# Altium PCB PCB_MegaMod to REbirth Adapter copy_2023-12-04.pcbdoc
Units mil, origin at the board's own origin, x right, y up, seen from the top; angles counter-clockwise.
Board outline 7598.64 x 5788.13 mil, 2 copper layers (Top Layer, Bottom Layer); 101 components, 67 nets, 302 pads, 8 vias.
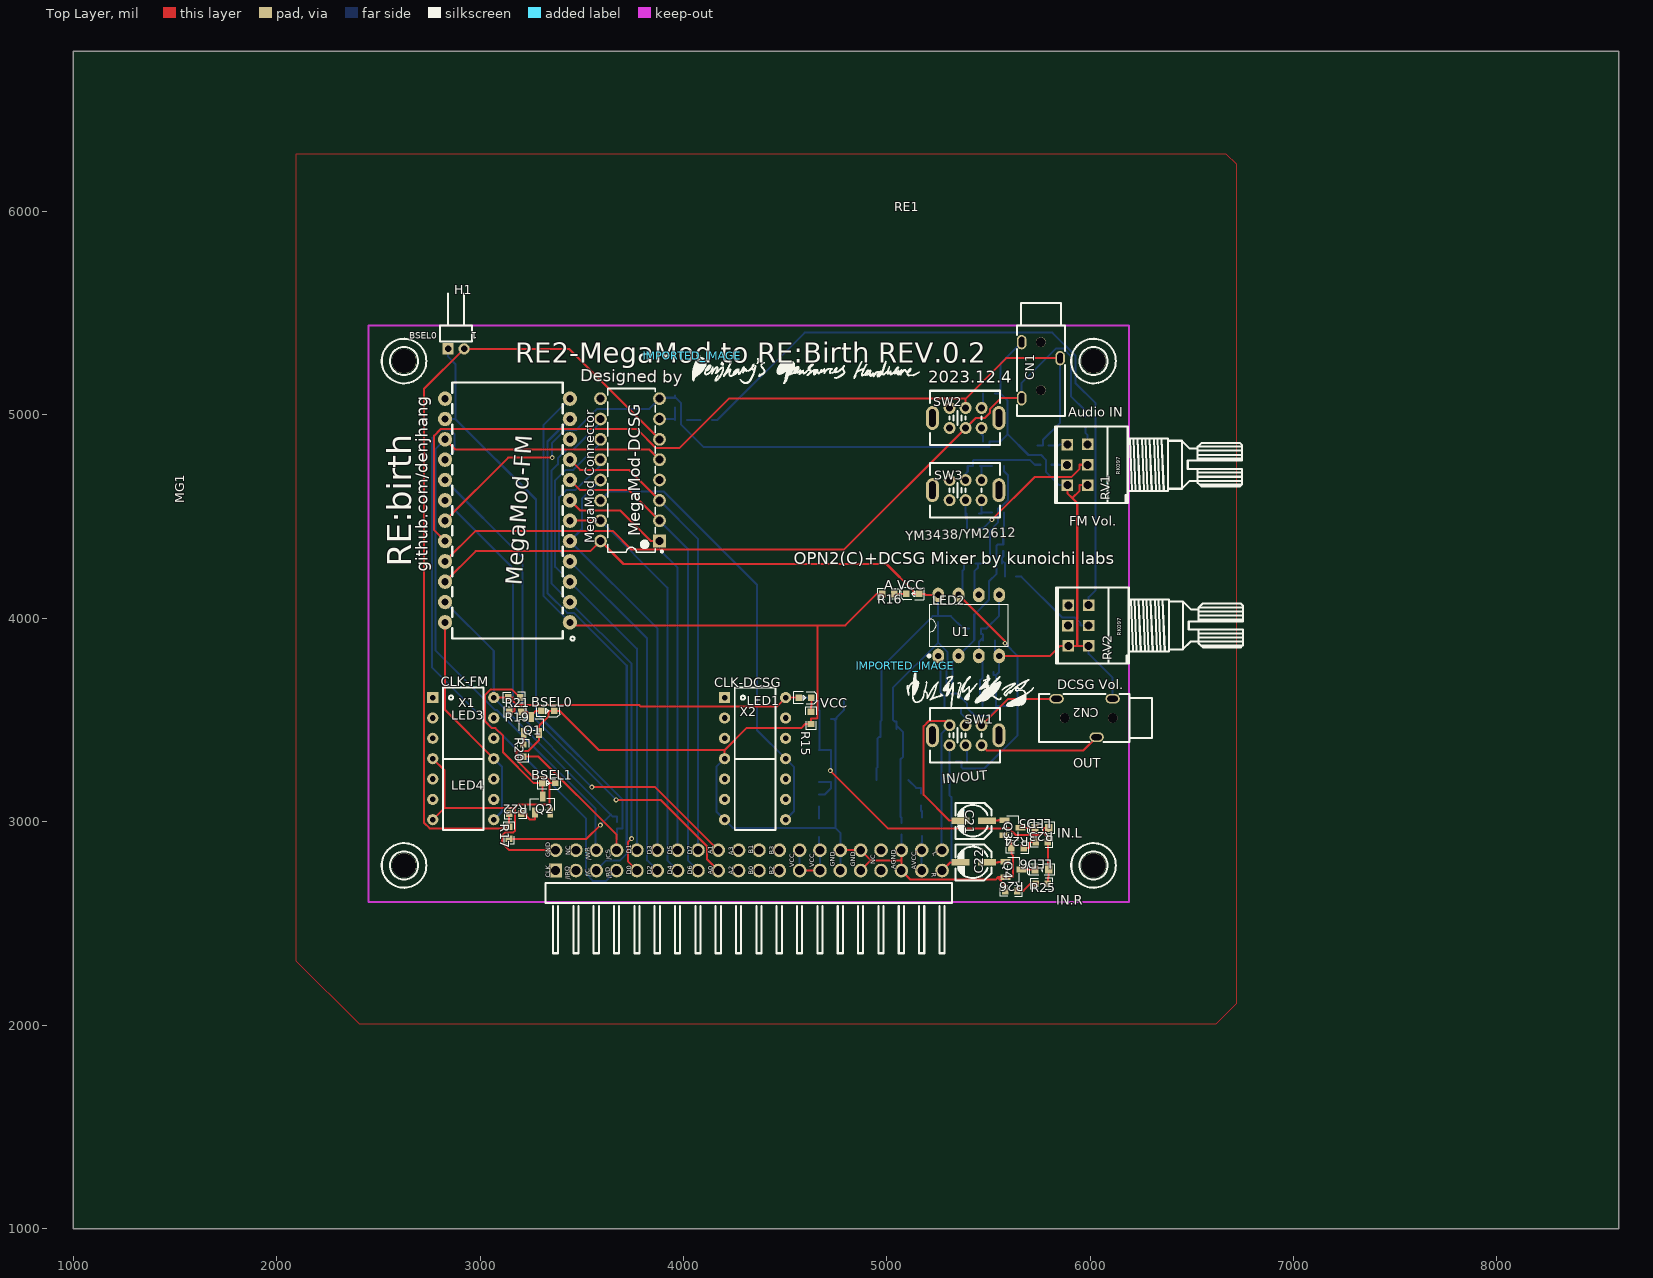
[diagram p0: Top Layer view]
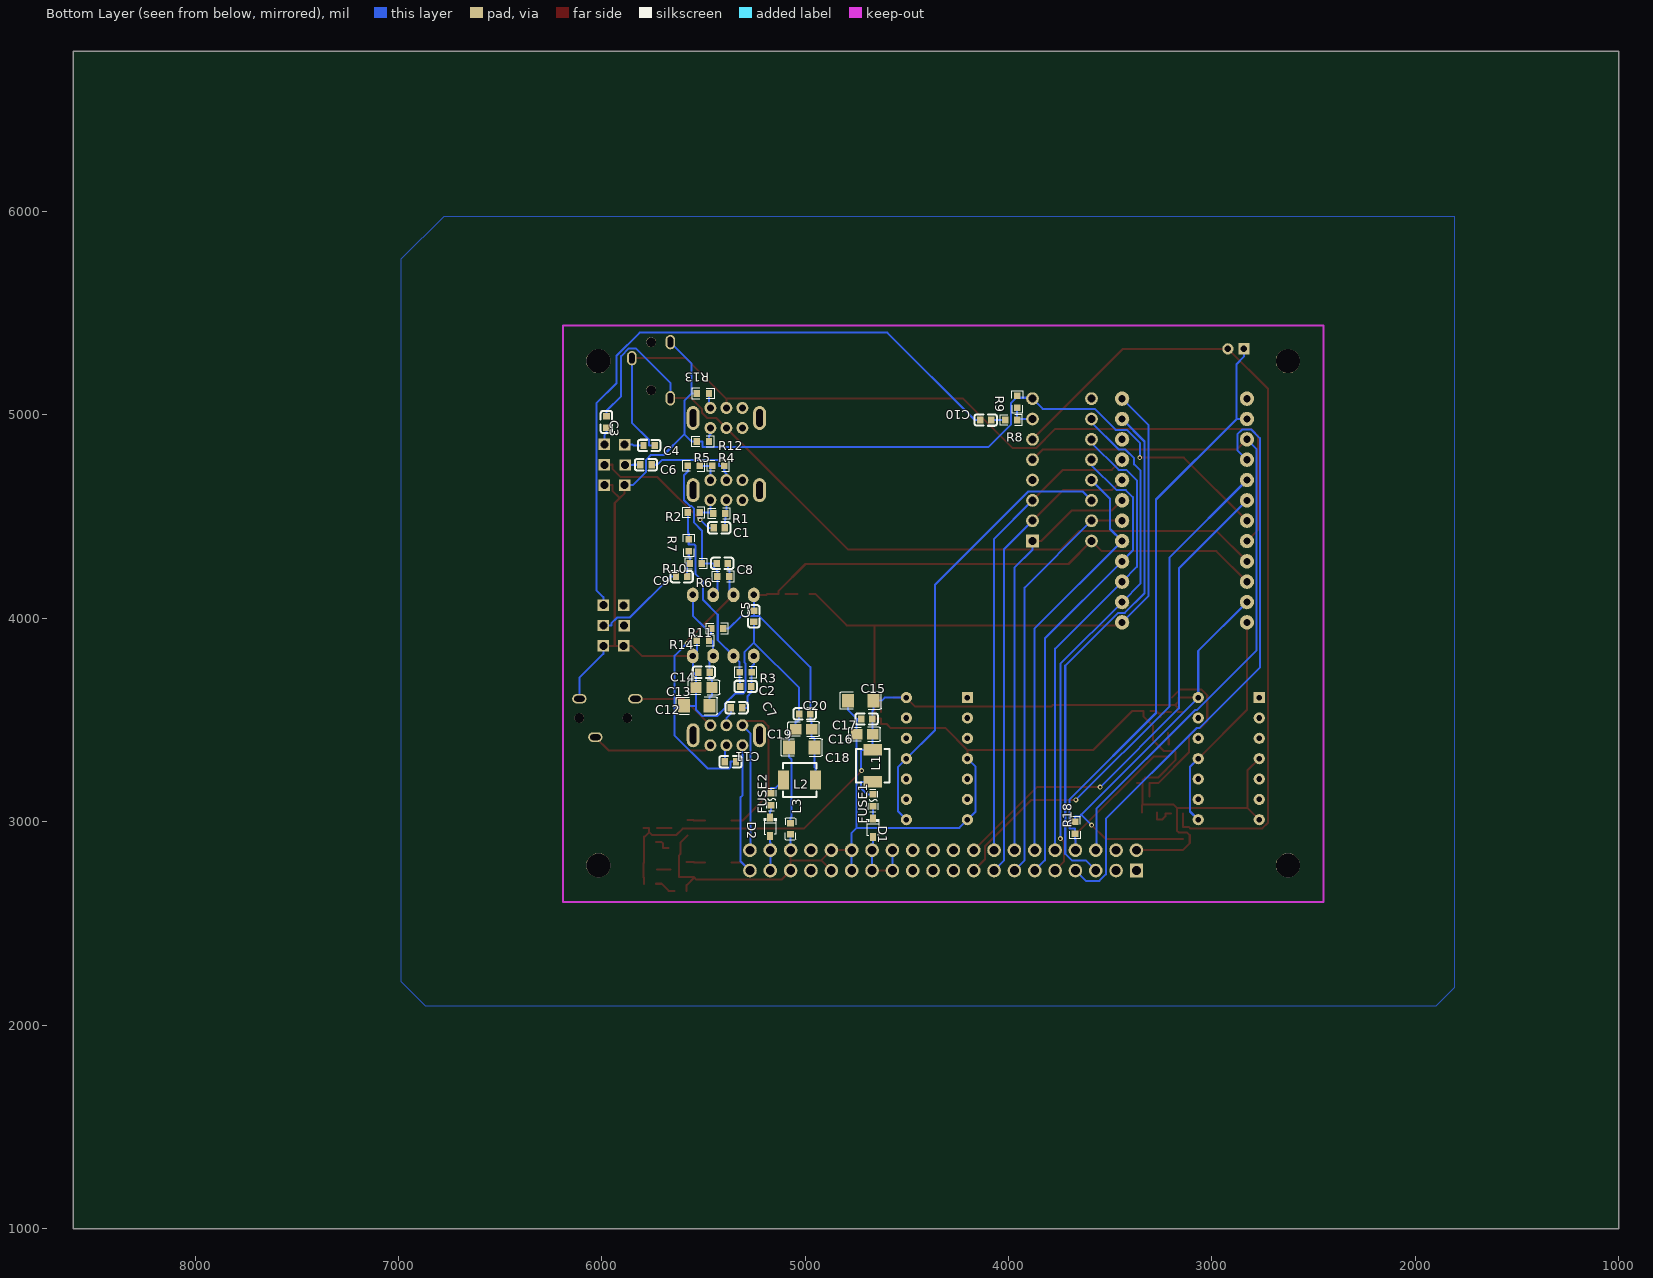
[diagram p1: Bottom Layer view, seen from below]

## Layer stack, top to bottom
Top Layer: signal copper (thickness not stored)
Dielectric: dielectric 12.6, FR-4, Dk 4.8
Bottom Layer: signal copper (thickness not stored)

## Board outline
8598.64,1000 1000,1000 1000,6788.13 8598.64,6788.13

## Components (designator, comment, footprint, x,y, rotation, side; value= is the part's Value field where it differs from the comment)
C1 "4.7u" C0603 5422.5,4445.02 r0 bottom
C2 "120p" C0603 5292.5,3665.03 r0 bottom
C3 "4.7u" C0603 5977.5,4965.02 r90 bottom
C4 "4.7u" C0603 5767.5,4850.02 r180 bottom
C5 "0.1u" C0603 5252.5,4010.03 r270 bottom
C6 "4.7u" C0603 5782.5,4755.02 r0 bottom
C7 "4.7u" C0603 5337.5,3560.03 r180 bottom
C8 "120p" C0603 5407.5,4270.02 r0 bottom
C9 "4.7u" C0603 5607.5,4205.02 r0 bottom
C10 "4.7u" C0603 4112.5,4975.02 r180 bottom
C11 "4.7u" C0603 5367.5,3295.03 r180 bottom
C12 "47u" C1206 5532.5,3570.03 r0 bottom
C13 "47u" C0805 5497.5,3660.03 r0 bottom
C14 "1n" C0603 5497.5,3735.03 r0 bottom
C15 "100u" C1206 4727.5,3595.03 r0 bottom
C16 "47u" C0805 4707.5,3430.03 r0 bottom
C17 "1n" C0603 4697.5,3505.03 r0 bottom
C18 "100u" C1206 5017.5,3365.03 r0 bottom
C19 "47u" C0805 5007.5,3455.03 r0 bottom
C20 "1n" C0603 5002.5,3530.03 r0 bottom
C21 "1u" CAP-D4.0×H5.5 5492.5,3005.03 r0 top
C22 "1u" CAP-D4.0×H5.5 5492.5,2800.03 r0 top
CN1 "PJ-320" AUDIO-TH_HOOYA_PJ-320 5757.5,5220.02 r270 top
CN2 "PJ-320" AUDIO-TH_HOOYA_PJ-320 5972.5,3510.03 r180 top
D1 "1N5819WS" SOD-323_L1.8-W1.3-LS2.5-RD 4667.5,2970.03 r90 bottom
D2 "1N5819WS" SOD-323_L1.8-W1.3-LS2.5-RD 5172.5,2975.03 r90 bottom
FUSE1 "PPTC0.5A/24V 自恢复保险丝-0603" F0603 4667.5,3105.03 r270 bottom
FUSE2 "PPTC0.5A/24V 自恢复保险丝-0603" F0603 5167.5,3110.03 r270 bottom
H1 "PZ200-1-02-W" HDR-TH_2P-P2.00-H-M-W7.2 2882.5,5325.02 r0 top
IMPORTED_IMAGE "IMPORTED_IMAGE" IMPORTED_IMAGE 5091.44,3766.32 r0 top
IMPORTED_IMAGE "IMPORTED_IMAGE" IMPORTED_IMAGE 4042.31,5291.12 r0 top
L1 "22uH" IND-SMD_L4.4-W4.0_PHC0420 4667.5,3275.03 r270 bottom
L2 "22uH" IND-SMD_L4.4-W4.0_PHC0420 5027.5,3205.03 r0 bottom
L3 "100Ω" L0603 5072.5,2965.03 r270 bottom
LED1 "LED0603" LED0603-RD 4597.5,3610.03 r180 top
LED2 "LED0603" LED0603-RD 5127.5,4120.02 r0 top
LED3 "LED0603" LED0603-RD 3332.5,3545.03 r180 top
LED4 "LED0603" LED0603-RD 3337.5,3190.03 r180 top
LED5 "LED-0603_R" LED0603_RED 5762.5,2970.03 r180 top
LED6 "LED-0603_R" LED0603_RED 5762.5,2765.03 r180 top
MG1 "MegaMod-Socket" MEGAMOD-SOCKET 3442.5,4735.02 r90 top
Q1 "MMBT3904" SOT-23-3_L2.9-W1.3-P1.90-LS2.4-BR 3252.5,3475.03 r270 top
Q2 "MMBT3904" SOT-23-3_L2.9-W1.3-P1.90-LS2.4-BR 3307.5,3085.03 r270 top
Q3 "MMBT3904" SOT-23-3_L2.9-W1.3-P1.90-LS2.4-BR 5617.5,2970.03 r180 top
Q4 "MMBT3904" SOT-23-3_L2.9-W1.3-P1.90-LS2.4-BR 5622.5,2765.03 r180 top
R1 "47k" R0603#1 5422.5,4515.02 r0 bottom
R2 "5k6" R0603#1 5547.5,4520.02 r0 bottom
R3 "100k" R0603#1 5292.5,3735.03 r0 bottom
R4 "47k" R0603#1 5427.5,4750.02 r0 bottom
R5 "5k6" R0603#1 5547.5,4750.02 r0 bottom
R6 "100k" R0603#1 5402.5,4205.02 r0 bottom
R7 "80k" R0603#1 5572.5,4360.02 r90 bottom
R8 "2k2" R0603#1 3987.5,4975.02 r0 bottom
R9 "2k2" R0603#1 3957.5,5065.02 r90 bottom
R10 "80k" R0603#1 5537.5,4270.02 r180 bottom
R11 "100k" R0603#1 5432.5,3950.03 r0 bottom
R12 "2k2" R0603#1 5502.5,4870.02 r0 bottom
R13 "2k2" R0603#1 5502.5,5105.02 r180 bottom
R14 "100k" R0603#1 5502.5,3890.03 r0 bottom
R15 "20k" R0603#2 4627.5,3510.03 r270 top
R16 "20k" R0603#2 5007.5,4120.02 r180 top
R17 "62k" R0603#2 3142.5,2945.03 r270 top
R18 "62k" R0603#1 3672.5,2970.03 r270 bottom
R19 "680r" R0603#2 3172.5,3540.03 r0 top
R20 "100r" R0603#2 3212.5,3350.03 r270 top
R21 "680r" R0603#2 3167.5,3610.03 r0 top
R22 "100r" R0603#2 3172.5,3040.03 r180 top
R23 "10k" R0603#2 5762.5,2900.03 r0 top
R24 "10k" R0603#2 5642.5,2870.03 r0 top
R25 "10k" R0603#2 5762.5,2695.03 r0 top
R26 "10k" R0603#2 5612.5,2660.03 r0 top
RE1 "REBIRTH SOUND BOARD" "REBIRTH SOUND BOARD" 2447.5,2605.03 r0 top
RV1 "10kΩ" RK097G-DJ 5987.5,4755.02 r90 top
RV2 "10kΩ" RK097G-DJ 5992.5,3965.03 r90 top
SW1 "SS-22D07" SW-TH_SS-22D07 5387.5,3425.03 r0 top
SW2 "SS-22D07" SW-TH_SS-22D07 5387.5,4985.02 r0 top
SW3 "SS-22D07" SW-TH_SS-22D07 5387.5,4630.02 r0 top
U1 "NE5532-DJ" DIP-8-DJ 5402.5,3965.03 r0 top
X1 "直插有源晶振" DIP14-有源晶振 2912.5,3310.03 r270 top
X2 "直插有源晶振" DIP14-有源晶振 4347.5,3310.03 r270 top
? "" ? 4462.5,5290.03 r0 top
? "" ? 2331.44,3861.92 r0 top
? "" ? 2911.37,2307.33 r0 top
? "" ? 5731.37,2131.01 r0 top
? "" ? 6985.52,3192.53 r0 top
? "" ? 6104.92,5586.88 r0 top
? "" ? 6392.5,5352.46 r0 top
? "" ? 2304.48,5353.61 r0 top
? "" ? 2538.9,5641.19 r0 top
? "" ? 2304.48,2693.61 r0 top
? "" ? 2538.9,2981.19 r0 top
? "" ? 6922.31,4357.24 r0 top
? "" ? 7093.99,5192.54 r0 top
? "" ? 6738.72,4995.14 r0 top
? "" ? 6339.36,2696.44 r0 top
? "" ? 6104.94,2408.86 r0 top
? "" ? 4321.26,5681.8 r0 top
? "" ? 6503,4022.34 r0 top
? "" ? 3517.28,5468.69 r0 top
? "" ? 2188.55,3628.17 r0 top
? "" ? 4237.5,4222.41 r0 top

## Footprints (in the part's own frame and the unit in brackets; to place one, negate y for a bottom-side part, rotate by r counter-clockwise, add the part's x,y. Pads: shape width x height; smd on the part's side, far side on the other; paste and mask are expansions set on the pad)
AUDIO-TH_HOOYA_PJ-320 [mm]
  oval 1.8x1.2 hole 0.7 slot 1.3 at 0 deg paste+0 mask+0.05: 2(-1.5,2.4) 3(-3.5,-2.4) 4(3.5,-2.4)
  round 1.2 hole 1.2 unplated paste+0: ""(-3.5,0) ""(2.5,0)
  silkscreen extent -8.4,-3.01 5.7,3.01
C0603 [mm]
  rect 0.8x0.9 smd paste+0 mask+0.051: 1(0.7,0) 2(-0.7,0)
  silkscreen extent -1.39,-0.72 1.41,0.71
C0805 [mm]
  rect 1.41x1.35 smd paste-100 mask+0.051: 1(1,0) 2(-1,0)
  silkscreen extent -1.96,-0.9 1.96,0.9
C1206 [mm]
  rect 1.485x1.728 smd paste-100 mask+0.051: 1(1.593,0) 2(-1.593,0)
  silkscreen extent -2.56,-1.09 2.56,1.09
CAP-D4.0×H5.5 [mm]
  rect 2.2x0.8 smd paste+0 mask+0.102: 1(0,0) 2(-3.302,0)
  silkscreen extent -3.94,-2.29 0.56,2.21
DIP14-有源晶振 [mil]
  rect 55x55 hole 28 paste+0 mask+2: 1(-300,-145)
  round 55 hole 28 paste+0 mask+2: 2(-200,-145) 3(-100,-145) 4(0,-145) 5(100,-145) 6(200,-145) 7(300,-145) 8(300,155) 9(200,155) 10(100,155) 11(0,155) 12(-100,155) 13(-200,155) 14(-300,155)
  silkscreen extent -350,-95 350,105
DIP-8-DJ [mm]
  oval 1.46x1.825 hole 0.8 paste+0 mask+0.051: 1(-3.81,-3.81) 2(-1.27,-3.81) 3(1.27,-3.81) 4(3.81,-3.81) 5(3.81,3.81) 6(1.27,3.81) 7(-1.27,3.81) 8(-3.81,3.81)
  silkscreen extent -5.1,-3.96 4.87,2.67
F0603 [mil]
  rect 31.75x34.02 smd paste-3937.01 mask+2: 1(29.66,0) 2(-29.65,0)
  silkscreen extent -55,-25 55,25
HDR-TH_2P-P2.00-H-M-W7.2 [mm]
  rect 1.4x1.4 hole 0.8 paste+0 mask+0.051: 1(-1,0)
  round 1.4 hole 0.8 paste+0 mask+0.051: 2(1,0)
  silkscreen extent -2,0.9 2,6.9
IMPORTED_IMAGE [mil]
  silkscreen extent 0,-213 642,0
IND-SMD_L4.4-W4.0_PHC0420 [mm]
  rect 1.4x2.35 smd paste+0 mask+0.051: 1(2,0) 2(-2,0)
  silkscreen extent -2.1,-2.1 2.1,2.1
L0603 [mm]
  rect 0.8x0.864 smd paste-100 mask+0.051: 1(0.7,0) 2(-0.7,0)
  silkscreen extent -1.41,-0.67 1.42,0.65
LED0603-RD [mm]
  rect 0.8x0.8 smd paste+0 mask+0.051: 1(-0.799,-0.003) 2(0.799,0.004)
  silkscreen extent -1.49,-0.75 1.39,0.76
LED0603_RED [mm]
  rect 0.9x1 smd paste+0 mask+0.051: 1(-0.85,0) 2(0.85,0)
  silkscreen extent -1.54,-0.73 1.75,0.73
MEGAMOD-SOCKET [mil]
R0603#1 [mil]
  rect 31.75x34.02 smd paste-3937.01 mask+2: 1(29.65,0) 2(-29.65,0)
  silkscreen extent -55,-26 55,26
R0603#2 [mil]
  rect 31.75x34.02 smd paste-3937.01 mask+2: 1(-29.65,0) 2(29.66,0)
  silkscreen extent -55,-26 55,26
"REBIRTH SOUND BOARD" [mil]
RK097G-DJ [mil]
  rect 56x56 hole 39.4 paste+0 mask+4: 1(-100,0) 2(0,0) 3(100,0) 4(-100,100) 5(-1,102) 6(99,100)
  silkscreen extent -187,-758 187,160
SOD-323_L1.8-W1.3-LS2.5-RD [mm]
  rect 1x0.75 smd paste+0 mask+0.051: 1(1.173,0) 2(-1.173,0)
  silkscreen extent -0.9,-0.8 1.08,0.8
SOT-23-3_L2.9-W1.3-P1.90-LS2.4-BR [mm]
  rect 1.25x0.7 smd paste+0 mask+0.051: 1(1,-0.95) 2(1,0.95) 3(-1,0)
  silkscreen extent -0.73,-1.53 0.73,1.53
SW-TH_SS-22D07 [mm]
  round 1.5 hole 0.9 paste+0 mask+0.051: 1(-2,1.25) 2(0,1.25) 3(2,1.25) 4(-2,-1.25) 5(0,-1.25) 6(2,-1.25)
  oval 1.6x3 hole 0.8 slot 2.2 at 90 deg paste+0 mask+0.051: 7(4.15,0) 8(-4.15,0)
  silkscreen extent -4.43,-3.4 4.27,3.4
? [mil]

## Free pads (board coordinates)
  rect 62.99x66.93 hole 43.31 paste+0 mask+2: 1(3371.41,2760.02)
  round 70.87 hole 35.43 paste+0 mask+2: 1(3442.11,3980.03) 2(3442.11,4080.03) 3(3442.11,4180.02) 4(3442.11,4280.02) 5(3442.11,4380.02) 6(3442.11,4480.02) 7(3442.11,4580.02) 8(3442.11,4680.02) 9(3442.11,4780.02) 10(3442.11,4880.02) 11(3442.11,4980.02) 12(3442.11,5080.02) 13(2827.94,5080.02) 14(2827.94,4980.02) 15(2827.94,4880.02) 16(2827.94,4780.02) 17(2827.94,4680.02) 18(2827.94,4580.02) 19(2827.94,4480.02) 20(2827.94,4380.02) 21(2827.94,4280.02) 22(2827.94,4180.02) 23(2827.94,4080.03) 24(2827.94,3980.03)
  round 66.93 hole 43.31 paste+0 mask+2: 2(3371.41,2860.02) 3(3471.41,2760.02) 4(3471.41,2860.02) 5(3571.41,2760.02) 6(3571.41,2860.02) 7(3671.41,2760.02) 8(3671.41,2860.02) 9(3771.41,2760.02) 10(3771.41,2860.02) 11(3871.41,2760.02) 12(3871.41,2860.02) 13(3971.41,2760.02) 14(3971.41,2860.02) 15(4071.41,2760.02) 16(4071.41,2860.02) 17(4171.41,2760.02) 18(4171.41,2860.02) 19(4271.41,2760.02) 20(4271.41,2860.02) 21(4371.41,2760.02) 22(4371.41,2860.02) 23(4471.41,2760.02) 24(4471.41,2860.02) 25(4571.41,2760.02) 26(4571.41,2860.02) 27(4671.41,2760.02) 28(4671.41,2860.02) 29(4771.41,2760.02) 30(4771.41,2860.02) 31(4871.41,2760.02) 32(4871.41,2860.02) 33(4971.41,2760.02) 34(4971.41,2860.02) 35(5071.41,2760.02) 36(5071.41,2860.02) 37(5171.41,2760.02) 38(5171.41,2860.02) 39(5271.41,2760.02) 40(5271.41,2860.02)
  rect 62.99x62.99 hole 39.37 paste+0 mask+2: 25(3882.26,4380.02)
  round 62.99 hole 39.37 paste+0 mask+2: 26(3882.26,4480.02) 27(3882.26,4580.02) 28(3882.26,4680.02) 29(3882.26,4780.02) 30(3882.26,4880.02) 31(3882.26,4980.02) 32(3882.26,5080.02) 33(3592.5,5080.02) 34(3592.5,4980.02) 35(3592.5,4880.02) 36(3592.5,4780.02) 37(3592.5,4680.02) 38(3592.5,4580.02) 39(3592.5,4480.02) 40(3592.5,4380.02)
  round 119.37 hole 119.37 unplated paste+0: ""(2626.35,2785.03) ""(2626.35,5265.02) ""(6016.35,2785.03) ""(6016.35,5265.02)

## Via types
v1: diameter 24.02, hole 12.01, Top Layer to Bottom Layer, tented both sides, 8 vias

## Nets (pads, with @x,y where several pads share a name; then routed paths per layer and width w, separated by ;. In a path a pad name is that pad's centre, name@x,y a point inside that pad or via, vN(x,y) a via of type N, cw(c..) or ccw(c..) an arc to the next point about the centre after c; other vN are vias at no path point)
47K-1-L: C1.2 R1.2 SW3.5 | length 152.9
  Bottom Layer w10: SW3.5 5387.5,4506.28 R1.2@5392.84,4500.94 ; R1.2 R1.2@5392.84,4500.94 ; C1.2 5394.94,4484.77 5392.84,4486.86 R1.2@5392.84,4500.94
47K-1-R: C6.2 R4.2 SW3.2 | length 469.3
  Bottom Layer w10: SW3.2 5387.5,4711.52 5397.84,4721.86 R4.2 5424.87,4750.02 5424.87,4777.06 5426.06,4778.24 5704.82,4778.24 5728.04,4755.02 C6.2
47K-2-L: R1.1 R2.2 SW3.6 | length 131.1
  Bottom Layer w10: R1.1 5465.67,4515.02 5466.24,4515.6 R1.1@5466.24,4520.02 ; SW3.6 R1.1@5466.24,4520.02 ; R2.2 5490.82,4520.02 R1.1@5466.24,4520.02
47K-2-R: R4.1 R5.2 SW3.3 | length 131.5
  Bottom Layer w10: R4.1 R4.1@5466.24,4750.02 ; SW3.3 R4.1@5466.24,4750.02 ; R5.2 R4.1@5466.24,4750.02
/IC: pad.5@3571.41,2760.02 pad.11@3442.11,4980.02 | length 2548.6
  Bottom Layer w10: pad.11@3442.11,4980.02 3331.6,4869.52 3331.6,4122.9 3427.81,4026.68 3461.46,4026.68 3721.36,3766.78 3721.36,2842.43 3688.95,2810.03 3621.42,2810.03 pad.5@3571.42,2760.03
/RD: pad.7@3671.41,2760.02 pad.16@2827.94,4780.02 | length 2931.8
  Bottom Layer w10: pad.16@2827.93,4780.02 2874.93,4827.02 2874.93,4904.06 2850.59,4928.4 2807.15,4928.4 2764.83,4886.09 2764.83,3757.43 3062.24,3460.03 3076.11,3460.03 3521.42,3014.72 3521.42,2741.64 3554.04,2709.03 3620.42,2709.03 pad.7@3671.42,2760.03
/WR: pad.6@3571.41,2860.02 pad.15@2827.94,4880.02 pad.29@3882.26,4780.02 | length 3467.9
  Top Layer w10: pad.15@2827.93,4880.02 2877.93,4830.02 3832.26,4830.02 pad.29@3882.26,4780.02
  Bottom Layer w10: pad.15@2827.93,4880.02 2781.29,4833.39 2781.29,3841.49 3074.05,3548.74 3083.54,3548.74 3568.17,3064.11 3568.17,2863.28 pad.6@3571.42,2860.03
A0: pad.17 | length 2604.4
  Top Layer w10: v1(3668.81,3107.41) 3887.2,3107.41 4116.09,2878.53 4116.09,2815.36 pad.17@4171.42,2760.03
  Bottom Layer w10: pad.17@2827.93,4680.02 3208.49,4299.47 3208.49,3567.74 v1(3668.81,3107.41)
A1: pad.18 | length 2458.9
  Top Layer w10: v1(3549.71,3170.39) 3861.06,3170.39 pad.18@4171.42,2860.03
  Bottom Layer w10: pad.18@2827.93,4580.02 3162.87,4245.09 3162.87,3557.22 v1(3549.71,3170.39)
A.GND: C5.1 C12.1 C13.1 C14.1 C18.1 C19.1 C20.1 CN1.3 CN2.3 L3.2 pad.19@2827.94,4480.02 pad.32@3882.26,5080.02 R9.1 R12.1 R13.2 R14.1 RV1.1 RV1.4 RV2.1 RV2.4 U1.4 | length 8094.6
  Top Layer w10: pad.19@2827.93,4480.02 3137.91,4790.01 v1(3354.97,4790.01) ; U1.4 5803.35,3815.03 5853.35,3865.03 RV2.4 5936.25,3865.03 ; RV1.4 5887.5,4615.88 5911.88,4591.51 ; RV1.1 5948.35,4655.02 5948.35,4627.98 5911.88,4591.51 ; RV2.1 5936.25,3865.03 ; 5911.88,4591.51 5936.25,4567.12 5936.25,3865.03
  Bottom Layer w10: v1(3354.97,4790.01) 3354.97,4862.38 3419.26,4926.66 3473.85,4926.66 3577.21,5030.02 3832.26,5030.02 3882.26,5080.02 3886.76,5084.52 3957.5,5084.52 R9.1@3957.5,5089.6 ; R9.1 R9.1@3957.5,5089.6 ; C19.1 C19.1@5046.87,3473.89 ; L3.2 5072.51,3019.49 5067.47,3024.53 5067.47,3307.12 5080.2,3319.86 C18.1 5080.2,3440.57 C19.1@5046.87,3473.89 ; C5.1 5252.5,3955.57 5252.5,3880.55 5252.39,3880.45 ; C14.1 5525.06,3720.59 C14.1@5536.87,3720.59 ; R14.1 5532.16,3835.36 U1.4 5552.5,3736.22 C14.1@5536.87,3720.59 ; R13.2 5559.18,5105.02 ; C12.1 5554.82,3570.03 5536.87,3570.03 ; CN1.3 5559.18,5253.98 5559.18,5105.02 ; RV1.4 5848.35,4655.02 5782.02,4721.35 5782.02,4779.48 5758.65,4802.85 5696.7,4802.85 5594.35,4905.19 ; RV2.1 5992.5,3825.88 6110.3,3708.07 CN2.3 ; R9.1@3957.5,5089.6 3987.5,5059.6 3987.5,4953.38 4099.07,4841.81 5503.94,4841.81 5505.13,4842.99 5505.13,4870.02 R12.1 5559.18,4870.02 5594.35,4905.19 ; C19.1@5046.87,3473.89 5046.87,3492.76 5038.46,3492.76 5030.06,3501.16 5030.06,3515.59 C20.1 5030.06,3658.11 5252.39,3880.45 ; 5252.39,3880.45 5297.4,3835.43 5297.4,3782.64 5292.3,3777.53 5292.3,3643.47 5305.21,3630.55 5344.72,3630.55 5394.67,3580.61 5394.67,3558.84 5433.63,3519.89 5506.98,3519.89 5536.87,3549.78 5536.87,3570.03 ; 5536.87,3570.03 5536.87,3622.3 C13.1 C14.1@5536.87,3720.59 ; 5559.18,5105.02 5594.35,5069.85 5594.35,4905.19
A.VCC: C5.2 C18.2 C19.2 C20.2 L2.2 LED2.2 pad.22@2827.94,4180.02 pad.40@3592.5,4380.02 R11.2 U1.8 | length 3855.7
  Top Layer w10: pad.22@2827.93,4180.02 2977.94,4330.03 3542.51,4330.03 3592.5,4380.02 3705.29,4267.23 4998.45,4267.23 5132.08,4133.6 5132.08,4120.16 LED2.2 5185.87,4120.16 5191.01,4115.02 U1.8
  Bottom Layer w10: L2.2 4948.76,3262.43 4954.8,3268.47 C18.2 4954.8,3410.2 4961.91,3417.3 4968.13,3417.3 C19.2 4968.13,3492.76 4974.94,3499.57 C20.2 4974.94,3760.03 5225.6,4010.68 5252.5,4010.68 ; U1.8 C5.2 5252.5,4010.68 ; R11.2 5375.82,3950.03 5315.16,4010.68 5252.5,4010.68
A.VCC-IN: D2.2 pad.37@5171.41,2760.02 pad.38@5171.41,2860.02 | length 169.3
  Bottom Layer w10: pad.37@5171.42,2760.03 5171.42,2860.03 5171.42,2896.95 5172.5,2898.03 D2.2
BSEL0: H1.1 pad.8@3671.41,2860.02 pad.14@2827.94,4980.02 R18.1 R20.2 | length 3593.7
  Top Layer w10: R20.2 3287.54,3320.36 3671.42,2936.49 pad.8@3671.42,2860.03
  Bottom Layer w10: pad.14@2827.93,4980.02 2879.08,4980.02 ; H1.1 2843.13,5286.31 2879.08,5250.36 2879.08,4980.02 ; pad.8@3671.42,2860.03 3671.42,2912.26 3672.5,2913.34 R18.1 3672.5,2967.39 3699.53,2967.39 3700.72,2968.59 3700.72,3109.03 3275.05,3534.7 3275.05,4584.06 2879.08,4980.02
BSEL1: H1.2 pad.30@3882.26,4880.02 R17.1 R22.2 | length 4053.7
  Top Layer w10: R22.2 3142.84,3011.86 3142.5,3011.53 R17.1 3114.34,2974.68 3107.46,2967.8 2752.15,2967.8 2724.62,2995.34 2724.62,5127.77 H1.2 3437.26,5325.02 pad.30@3882.26,4880.02
C7_1: C2.2 C7.1 R3.2 U1.1 | length 294.6
  Bottom Layer w10: U1.1 5252.5,3773.53 5262.84,3763.18 R3.2 5262.84,3724.97 5262.84,3706.86 5264.94,3704.76 C2.2 5264.94,3636.16 5277.04,3624.05 5277.04,3623.84 5283.04,3617.84 5283.04,3560.03 C7.1
C7_2: C7.2 SW1.2 | length 95.1
  Bottom Layer w10: C7.2 5365.06,3531.16 5387.49,3508.72 SW1.2
C10_1: C10.1 R8.1 | length 67.8
  Bottom Layer w10: R8.1 C10.1
C11_1: C8.2 C11.1 R6.2 U1.7 | length 1375.5
  Top Layer w10: U1.7 5580.94,3886.59 v1(5580.94,3877.26)
  Bottom Layer w10: C11.1 5366.84,3295.03 5366.84,3268.12 5372.97,3261.99 5480.13,3261.99 5641.42,3423.28 5641.42,3816.78 v1(5580.94,3877.26) ; U1.7 5372.84,4135.36 R6.2 5372.84,4234.06 5379.94,4241.15 C8.2
C11_2: C11.2 SW1.5 | length 83.9
  Bottom Layer w10: SW1.5 5395.06,3368.24 C11.2
C21_1: C21.1 Q3.1 | length 86.6
  Top Layer w10: C21.1 5546.96,3005.03 5549.36,3007.43 Q3.1
CLK-DCSG: pad.38@3592.5,4580.02 X2.8 X2.11 | length 2224.7
  Bottom Layer w10: pad.38@3592.5,4580.02 3636.25,4623.77 3904,4623.77 4361.45,4166.32 4361.45,3451.07 X2.11 4542.82,3269.7 4542.82,3050.34 X2.8
CLK-FM: pad.24@2827.94,3980.03 X1.8 X1.11 | length 1102.6
  Top Layer w10: pad.24@2827.93,3980.03 2827.93,3549.59 X1.11
  Bottom Layer w10: X1.8 3107.82,3050.34 3107.82,3269.7 X1.11
D0: pad.2@3442.11,4080.03 pad.9@3771.41,2760.02 pad.34@3592.5,4980.02 | length 2529.2
  Top Layer w10: v1(3745.54,2917.14) 3726.75,2898.34 3726.75,2804.7 pad.9@3771.42,2760.03
  Bottom Layer w10: pad.34@3592.5,4980.02 3592.5,4964.4 3458.12,4830.02 3425.76,4830.02 3382.42,4786.69 3382.42,4757.55 3350.42,4725.55 3350.42,4171.72 3442.11,4080.03 3745.54,3776.59 v1(3745.54,2917.14)
D1: pad.3@3442.11,4180.02 pad.10@3771.41,2860.02 pad.35@3592.5,4880.02 | length 2301.2
  Bottom Layer w10: pad.35@3592.5,4880.02 3592.5,4863.84 3458.67,4730.01 3421.07,4730.01 3369.09,4678.02 3369.09,4253.05 3442.11,4180.02 3771.42,3850.72 pad.10@3771.42,2860.03
D2: pad.4@3442.11,4280.02 pad.11@3871.41,2760.02 pad.36@3592.5,4780.02 | length 2331.3
  Bottom Layer w10: pad.36@3592.5,4780.02 3592.5,4753.45 3469.07,4630.02 3423.16,4630.02 3388.6,4595.47 3388.6,4333.53 3442.11,4280.02 3821.43,3900.7 3821.43,2810.01 pad.11@3871.42,2760.03
D3: pad.5@3442.11,4380.02 pad.12@3871.41,2860.02 pad.37@3592.5,4680.02 | length 2060.1
  Bottom Layer w10: pad.37@3592.5,4680.02 3501.38,4588.9 3501.38,4439.3 3442.11,4380.02 3871.42,3950.72 pad.12@3871.42,2860.03
D4: pad.6@3442.11,4480.02 pad.13@3971.41,2760.02 pad.39@3592.5,4480.02 | length 2027.3
  Top Layer w10: pad.6@3442.11,4480.02 pad.39@3592.5,4480.02
  Bottom Layer w10: pad.39@3592.5,4480.02 3921.42,4151.1 3921.42,2810.03 pad.13@3971.42,2760.03
D5: pad.7@3442.11,4580.02 pad.14@3971.41,2860.02 pad.25@3882.26,4380.02 | length 2079.9
  Top Layer w10: pad.7@3442.11,4580.02 3492.11,4530.02 3689.62,4530.02 3839.62,4380.02 pad.25@3882.26,4380.02
  Bottom Layer w10: pad.25@3882.26,4380.02 3882.26,4337.38 3971.42,4248.22 pad.14@3971.42,2860.03
D6: pad.8@3442.11,4680.02 pad.15@4071.41,2760.02 pad.26@3882.26,4480.02 | length 2321.3
  Top Layer w10: pad.8@3442.11,4680.02 3492.11,4630.02 3732.26,4630.02 pad.26@3882.26,4480.02
  Bottom Layer w10: pad.26@3882.26,4480.02 4021.42,4340.86 4021.42,2810.03 pad.15@4071.42,2760.03
D7: pad.9@3442.11,4780.02 pad.16@4071.41,2860.02 pad.27@3882.26,4580.02 | length 2321.3
  Top Layer w10: pad.9@3442.11,4780.02 3492.17,4729.97 3732.32,4729.97 pad.27@3882.26,4580.02
  Bottom Layer w10: pad.27@3882.26,4580.02 4071.42,4390.86 pad.16@4071.42,2860.03
FUSE1_1: D1.1 FUSE1.1 | length 59.2
  Bottom Layer w10: D1.1 FUSE1.1
FUSE1_2: FUSE1.2 L1.1 | length 159.6
  Bottom Layer w10: FUSE1.2 4696.21,3134.68 4724.91,3163.39 4724.91,3196.28 L1.1
FUSE2_1: D2.1 FUSE2.1 | length 63.4
  Bottom Layer w10: FUSE2.1 5167.5,3053.34 5168.82,3052.03 5172.5,3052.03 D2.1
FUSE2_2: FUSE2.2 L2.1 | length 104.2
  Bottom Layer w10: L2.1 5144.56,3166.7 5167.5,3166.7 FUSE2.2
GND: C15.1 C16.1 C17.1 L3.1 LED3.1 LED4.1 pad.1@3442.11,3980.03 pad.2@3371.41,2860.02 pad.12@3442.11,5080.02 pad.29@4771.41,2760.02 pad.30@4771.41,2860.02 pad.31@4871.41,2760.02 pad.32@4871.41,2860.02 pad.35@5071.41,2760.02 pad.36@5071.41,2860.02 Q1.2 Q2.2 Q3.2 Q4.2 R15.2 R16.2 R24.1 R26.1 X1.4 X1.7 X2.4 X2.7 | length 10126.9
  Top Layer w10: X1.7 2825.72,3068.24 ; X1.4 2825.72,3251.8 2825.72,3068.24 ; Q2.2 3344.9,3081.41 3340.83,3085.49 ; LED4.1 3342.08,3190.16 ; pad.2@3371.41,2860.03 3143.58,2860.03 3109.28,2894.32 3109.28,2933.55 3123.33,2947.59 3164.15,2947.59 3172.5,2955.95 3172.5,3068.07 ; pad.1@3442.11,3980.03 3457.05,3965.09 4659.58,3965.09 ; X2.4 4202.5,3352.76 ; pad.30@4771.42,2860.03 4871.42,2860.03 4921.42,2810.03 ; pad.31@4871.42,2760.03 4921.42,2810.03 ; R16.2 4950.82,4120.02 4795.88,3965.09 4659.58,3965.09 ; pad.36@5071.42,2860.03 5071.42,2810.03 ; Q3.2 5612.57,2898.18 5612.84,2898.18 R24.1 5612.84,2841.86 5621.48,2833.22 5621.48,2730.22 5618.89,2727.62 Q4.2 5547.37,2727.62 5545.34,2725.59 ; R26.1 5582.84,2688.18 5582.75,2688.18 5545.34,2725.59 ; 2825.72,3068.24 3172.33,3068.24 3172.5,3068.07 ; 3172.5,3068.07 3189.91,3085.49 3340.83,3085.49 ; 3340.83,3085.49 3340.83,3188.91 3342.08,3190.16 ; 3342.08,3190.16 3342.08,3203.62 3328.64,3217.07 3265.5,3217.07 3178.17,3304.39 3178.17,3341.88 3184.43,3348.14 3238.14,3348.14 3289.9,3399.89 Q1.2 3289.9,3453.53 3289.9,3471.41 3337.08,3518.59 3337.08,3545.16 LED3.1 3390.88,3545.16 3583.28,3352.76 4202.5,3352.76 ; 4202.5,3352.76 4309.76,3460.03 4579,3460.03 4599.34,3480.36 R15.2 4627.5,3507.39 4654.53,3507.39 4659.58,3512.45 4659.58,3965.09 ; 4921.42,2810.03 5071.42,2810.03 ; 5071.42,2810.03 5071.42,2760.03 5116.27,2715.18 5534.92,2715.18 5545.34,2725.59
  Bottom Layer w10: pad.1@3442.11,3980.03 3311.69,4110.44 3311.69,4949.6 pad.12@3442.11,5080.02 ; X2.4 4162.18,3269.7 4162.18,3050.34 X2.7 4242.5,2970.03 4746.87,2970.03 ; C17.1 C17.1@4738.51,3505.03 ; pad.29@4771.42,2760.03 4771.42,2860.03 4771.42,2945.47 4746.87,2970.03 ; C15.1 4790.2,3549.86 4751.96,3511.61 4751.96,3505.03 C17.1@4738.51,3505.03 ; pad.36@5071.42,2860.03 5071.42,2909.47 5072.51,2910.57 L3.1 ; C17.1@4738.51,3505.03 4746.87,3496.66 C16.1 4746.87,3392.3 4746.87,2970.03
IN.FM-L: C3.1 CN1.4 pad.21@2827.94,4280.02 SW2.5 | length 3984.7
  Top Layer w10: pad.21@2827.93,4280.02 2977.93,4430.02 3651.96,4430.02 3744.67,4337.31 4789.01,4337.31 SW2.5 5436.72,4985.02 5481.33,4985.02 5508.18,5011.88 5508.18,5030.26 5560.15,5082.23 CN1.4
  Bottom Layer w10: CN1.4 5663.02,5157.44 5832.71,5327.14 5866.87,5327.14 5904.92,5289.09 5904.92,5092.06 5977.5,5019.48 C3.1
IN.FM-R: C4.1 CN1.2 pad.20@2827.94,4380.02 SW2.2 | length 4390.1
  Top Layer w10: pad.20@2827.93,4380.02 2774.42,4433.53 2774.42,4898.53 2805.76,4929.88 3772,4929.88 3865.11,4836.77 3980.16,4836.77 4223.54,5080.15 5387.5,5080.15 ; SW2.2 5387.5,5080.15 ; CN1.2 5586.43,5279.07 5387.5,5080.15
  Bottom Layer w10: C4.1 5766.84,4850.02 5766.84,4876.93 5852,4962.09 CN1.2
IN.PSG: pad.31@3882.26,4980.02 R8.2 R9.2 | length 135.7
  Bottom Layer w10: pad.31@3882.26,4980.02 R8.2@3957.5,4980.02 ; R9.2 3957.5,5008.35 R8.2@3957.5,4980.02 ; R8.2 3957.84,4979.69 R8.2@3957.5,4980.02
LED1_1: LED1.1 R15.1 | length 71.1
  Top Layer w10: R15.1 4627.5,3566.7 4628.98,3568.18 LED1.1
LED3_2: LED3.2 Q1.3 R19.2 | length 125.2
  Top Layer w10: R19.2 3229.18,3540.03 3236.93,3532.28 Q1.3@3252.5,3532.28 ; Q1.3 Q1.3@3252.5,3532.28 ; LED3.2 3274.13,3544.89 3261.52,3532.28 Q1.3@3252.5,3532.28
LED4_2: LED4.2 Q2.3 R21.2 | length 851.7
  Top Layer w10: R21.2 3156.52,3650.66 3053.08,3650.66 3023.26,3620.84 3023.26,3495.2 3058.43,3460.03 3075.74,3460.03 3114.01,3421.76 3114.01,3340.51 3264.63,3189.89 LED4.2 3306.03,3161.62 3307.5,3160.16 Q2.3
LED5_2: LED5.2 Q3.3 | length 72.2
  Top Layer w10: Q3.3 LED5.2
MIX.L: C2.1 R2.1 R3.1 R7.1 U1.2 | length 977.3
  Bottom Layer w10: C2.1 5320.06,3693.89 5322.16,3695.99 R3.1 5322.16,3784.68 U1.2 5429.93,3892.45 5429.93,4017.78 5502.5,4090.36 5502.5,4182.48 5540.07,4220.05 5540.07,4357.26 5545.47,4362.65 5572.5,4362.65 R7.1 5572.5,4416.7 5577.16,4421.36 R2.1
MIX.R: C8.1 R5.1 R6.1 R10.1 U1.6 | length 771.6
  Bottom Layer w10: C8.1 C8.1@5448.51,4270.02 ; U1.6 5432.16,4135.36 R6.1 5432.16,4233.19 5448.51,4249.53 C8.1@5448.51,4270.02 ; R5.1 5577.16,4721.86 5595.87,4703.15 5595.87,4581.47 5566.92,4552.52 5559.45,4552.52 5546.32,4539.39 5546.32,4470.2 5507.84,4431.73 R10.1 5461.96,4270.02 C8.1@5448.51,4270.02
OUT.L: CN2.4 SW1.3 | length 422.4
  Top Layer w10: SW1.3 5596.51,3604.51 CN2.4
OUT.R: CN2.2 SW1.6 | length 602.3
  Top Layer w10: SW1.6 5490.98,3351.05 5967.08,3351.05 CN2.2
Q1_1: Q1.1 R20.1 | length 57
  Top Layer w10: R20.1 3212.5,3406.7 3215.1,3409.3 Q1.1
Q4_1: C22.1 Q4.1 | length 92.8
  Top Layer w10: C22.1 5546.96,2800.03 5547.37,2800.43 5547.37,2802.43 Q4.1
Q4_3: LED6.2 Q4.3 | length 67.2
  Top Layer w10: Q4.3 LED6.2
R7_2: C9.2 R7.2 R10.2 | length 147
  Bottom Layer w10: R10.2 R10.2@5567.16,4284.1 ; R7.2 5572.5,4303.35 5572.32,4303.35 5567.16,4298.19 R10.2@5567.16,4284.1 ; C9.2 5579.94,4271.32 R10.2@5567.16,4284.1
R12_2: R12.2 SW2.6 | length 68.5
  Bottom Layer w10: SW2.6 5466.24,4904.78 5472.84,4898.19 R12.2
R13_1: R13.1 SW2.3 | length 73.5
  Bottom Layer w10: SW2.3 5472.84,5040.84 R13.1
R16_1: LED2.1 R16.1 | length 58.9
  Top Layer w10: R16.1 5068.98,4120.02 5069.12,4119.89 LED2.1
R22_1: Q2.1 R22.1 | length 124.1
  Top Layer w10: R22.1 3229.18,3040.03 3229.18,3026.51 3245.8,3009.89 3270.1,3009.89 Q2.1
R24_2: R23.1 R24.2 | length 86.8
  Top Layer w10: R24.2 5699.18,2870.03 5699.18,2893.39 5705.82,2900.03 R23.1
R25_1: R25.1 R26.2 | length 105.2
  Top Layer w10: R26.2 5670.82,2660.03 5705.82,2695.03 R25.1
RV1_2: C1.1 RV1.2 | length 677.3
  Top Layer w10: v1(5516.49,4484.56) 5726.17,4694.23 5907.13,4694.23 5948.35,4735.45 5948.35,4755.02 RV1.2
  Bottom Layer w10: C1.1 5476.96,4445.02 v1(5516.49,4484.56)
RV1_3: C3.2 RV1.3 | length 86.6
  Bottom Layer w10: C3.2 5977.5,4910.56 5987.5,4900.56 RV1.3
RV1_5: C6.1 RV1.5 | length 75.9
  Bottom Layer w10: C6.1 5845.35,4755.02 5846.35,4754.02 RV1.5
RV1_6: C4.2 RV1.6 | length 94.1
  Bottom Layer w10: C4.2 5844.35,4850.02 5848.35,4854.02 RV1.6
RV2_2: C9.1 RV2.2 | length 462.6
  Bottom Layer w10: C9.1 5661.96,4205.02 5862.81,4004.18 5924,4004.18 5953.35,3974.82 5953.35,3965.03 RV2.2
RV2_3: C10.2 RV2.3 | length 3293.8
  Bottom Layer w10: C10.2 4166.96,4975.02 4596.53,5404.6 5814.08,5404.6 5927.63,5291.05 5927.63,5156.34 6026.71,5057.26 6026.71,4138.39 5992.5,4104.18 RV2.3
SLOT.L: C21.2 pad.40@5271.41,2860.02 SW1.1 | length 1351.1
  Top Layer w10: SW1.1@5308.75,3474.24 5287.71,3495.28 5206.42,3495.28 5181.4,3470.26 5181.4,3131.66 5308.04,3005.03 C21.2
  Bottom Layer w10: pad.40@5271.42,2860.03 5268.01,2863.43 5268.01,3433.49 SW1.1@5308.75,3474.24
SLOT.R: C22.2 pad.39@5271.41,2760.02 SW1.4 | length 748.4
  Top Layer w10: pad.39@5271.42,2760.03 5308.04,2796.64 5308.04,2800.03 C22.2
  Bottom Layer w10: pad.39@5271.42,2760.03 5317.82,2806.43 5317.82,3119.32 5308.75,3128.39 SW1.4@5308.75,3375.8
VBIAS: C12.2 C13.2 C14.2 R11.1 R14.2 U1.3 U1.5 | length 650.9
  Bottom Layer w10: C12.2 5469.8,3615.2 5465.24,3615.2 5458.13,3622.3 C13.2 5458.13,3697.76 5461.54,3697.76 5469.94,3706.16 C14.2 5469.94,3797.59 U1.3 5452.5,3883.76 R14.2@5472.84,3904.11 ; R14.2 R14.2@5472.84,3904.11 ; U1.5 5552.5,4013.34 5489.18,3950.03 R11.1 5462.16,3921.86 5469.16,3921.86 5472.84,3918.18 R14.2@5472.84,3904.11
VCC: C15.2 C16.2 C17.2 L1.2 LED1.2 LED5.1 LED6.1 pad.23@2827.94,4080.03 R17.2 R18.2 R19.1 R21.1 R23.2 R25.2 X1.14 X2.14 | length 5681.2
  Top Layer w10: X1.14 R21.1 3164.87,3610.03 3164.87,3589.53 3180.65,3573.76 ; R17.2 3523.58,2915.36 v1(3591.39,2983.18) ; R19.1 3169.87,3540.03 3169.87,3562.97 3180.65,3573.76 ; LED1.2 4539.13,3609.89 4538.99,3610.03 X2.14 4458.17,3565.7 3790.71,3565.7 3782.65,3573.76 3180.65,3573.76 ; v1(4722.62,3251.55) 5007.79,2966.39 5602.43,2966.39 5635.12,2933.7 5752.42,2933.7 5767.1,2948.38 ; R25.2 5792.16,2723.18 5795.97,2726.99 LED6.1 5795.97,2795.86 5792.16,2799.68 R23.2 5792.16,2928.18 5787.29,2928.18 5767.1,2948.38 ; LED5.1 5767.1,2970.03 5767.1,2948.38
  Bottom Layer w10: pad.23@2827.93,4080.03 3067.5,3840.45 X1.14 3642.87,3034.66 ; v1(3591.39,2983.18) 3642.87,3034.66 ; R18.2 3672.5,3026.7 3650.82,3026.7 3642.87,3034.66 ; X2.14 4609.42,3610.03 4624.42,3595.03 C15.2 4664.8,3549.86 4669.94,3544.72 C17.2 4669.94,3469.57 4668.13,3467.76 C16.2 4668.13,3354.39 L1.2 4724.91,3353.76 4724.91,3253.84 v1(4722.62,3251.55)
VCC-IN: D1.2 pad.25@4571.41,2760.02 pad.26@4571.41,2860.02 pad.27@4671.41,2760.02 pad.28@4671.41,2860.02 | length 365.5
  Top Layer w10: pad.25@4571.42,2760.03 pad.27@4671.42,2760.03
  Bottom Layer w10: pad.25@4571.42,2760.03 pad.26@4571.42,2860.03 ; D1.2 4667.5,2893.03 4671.42,2889.11 4671.42,2860.03 pad.27@4671.42,2760.03
pads on no net: CN1. CN2. RV2.5 RV2.6 SW1.7 SW1.8 SW2.1 SW2.4 SW2.7 SW2.8 SW3.1 SW3.4 SW3.7 SW3.8 X1.1 X1.2 X1.3 X1.5 X1.6 X1.9 X1.10 X1.12 X1.13 X2.1 X2.2 X2.3 X2.5 X2.6 X2.9 X2.10 X2.12 X2.13

## Polygon pours and split planes (outlines as drawn)
A.GND on Bottom Layer (solid): 1807.5,5975.02 6777.5,5975.02 6987.5,5765.02 6987.5,2215.03 6867.5,2095.03 1897.5,2095.03 1807.5,2185.03
GND on Top Layer (solid): 2097.5,6285.02 6667.5,6285.02 6717.5,6235.02 6717.5,2105.03 6617.5,2005.03 2407.5,2005.03 2097.5,2315.03

## Silkscreen, mask and mechanical layers (free items; w line width, h text height)
Top Overlay:
  circle w10: c2626.34,5265.02 r109.66
  circle w10: c2626.34,5265.02 r69.46
  circle w10: c6016.34,5265.02 r109.66
  circle w10: c6016.34,5265.02 r69.46
  circle w10: c6016.34,2785.03 r109.66
  circle w10: c6016.34,2785.03 r69.46
  circle w10: c2626.35,2785.03 r109.66
  circle w10: c2626.35,2785.03 r69.46
  circle w10: c3455.02,3900.03 r10
  lines w7.87: 3628.32,4363.45 3628.32,4324.52 3719.07,4324.52 cw(c3744.07,4324.52) 3769.07,4324.52 3860.61,4324.52 3860.61,4340.74 ; 3628.32,4396.6 3628.32,4463.45 ; 3628.32,4496.6 3628.32,4563.45 ; 3628.32,4596.6 3628.32,4663.45 ; 3628.32,4696.6 3628.32,4763.45 ; 3628.32,4796.6 3628.32,4863.45 ; 3628.32,4896.6 3628.32,4963.45 ; 3628.32,4996.6 3628.32,5063.45 ; 3628.32,5096.6 3628.32,5130.02 3860.61,5130.02 3860.61,5113.08 ; 3860.61,4419.31 3860.61,4446.97 ; 3860.61,4513.08 3860.61,4546.97 ; 3860.61,4613.08 3860.61,4646.97 ; 3860.61,4713.08 3860.61,4746.97 ; 3860.61,4813.08 3860.61,4846.97 ; 3860.61,4913.08 3860.61,4946.97 ; 3860.61,5013.08 3860.61,5046.97
  lines w9.84: 3893.97,4323.92 cw(c3894.02,4328.85) 3894.07,4323.92
  lines w10: 2863.37,3953.11 2863.37,3900.1 3406.68,3900.1 3406.68,3936.43 ; 2863.37,4006.93 2863.37,4053.11 ; 2863.37,4106.94 2863.37,4153.11 ; 2863.37,4206.94 2863.37,4253.11 ; 2863.37,4306.94 2863.37,4353.11 ; 2863.37,4406.94 2863.37,4453.11 ; 2863.37,4506.94 2863.37,4553.11 ; 2863.37,4606.94 2863.37,4653.11 ; 2863.37,4706.94 2863.37,4753.11 ; 2863.37,4806.94 2863.37,4853.11 ; 2863.37,4906.94 2863.37,4953.11 ; 2863.37,5006.94 2863.37,5053.11 ; 2863.37,5106.94 2863.37,5159.95 3406.68,5159.95 3406.68,5106.94 ; 3358.71,2585.22 3358.71,2353.33 3384.01,2353.33 3384.01,2585.22 ; 3406.68,4023.62 3406.68,4053.11 ; 3406.68,4106.94 3406.68,4153.11 ; 3406.68,4206.94 3406.68,4253.11 ; 3406.68,4306.94 3406.68,4353.11 ; 3406.68,4406.94 3406.68,4453.11 ; 3406.68,4506.94 3406.68,4553.11 ; 3406.68,4606.94 3406.68,4653.11 ; 3406.68,4706.94 3406.68,4753.11 ; 3406.68,4806.94 3406.68,4853.11 ; 3406.68,4906.94 3406.68,4953.11 ; 3406.68,5006.94 3406.68,5053.11 ; 3458.72,2585.22 3458.72,2353.33 3484.02,2353.33 3484.02,2585.22 ; 3558.72,2585.22 3558.72,2353.33 3584.02,2353.33 3584.02,2585.22 ; 3658.71,2585.22 3658.71,2353.33 3684.01,2353.33 3684.01,2585.22 ; 3758.71,2585.22 3758.71,2353.33 3784.01,2353.33 3784.01,2585.22 ; 3858.71,2585.22 3858.71,2353.33 3884.01,2353.33 3884.01,2585.22 ; 3958.71,2585.22 3958.71,2353.33 3984.01,2353.33 3984.01,2585.22 ; 4058.71,2585.22 4058.71,2353.33 4084.01,2353.33 4084.01,2585.22 ; 4158.71,2585.22 4158.71,2353.33 4184.01,2353.33 4184.01,2585.22 ; 4258.71,2585.22 4258.71,2353.33 4284.01,2353.33 4284.01,2585.22 ; 4358.71,2585.22 4358.71,2353.33 4384.01,2353.33 4384.01,2585.22 ; 4458.71,2585.22 4458.71,2353.33 4484.01,2353.33 4484.01,2585.22 ; 4558.71,2585.22 4558.71,2353.33 4584.01,2353.33 4584.01,2585.22 ; 4658.71,2585.22 4658.71,2353.33 4684.01,2353.33 4684.01,2585.22 ; 4758.71,2585.22 4758.71,2353.33 4784.01,2353.33 4784.01,2585.22 ; 4858.71,2585.22 4858.71,2353.33 4884.01,2353.33 4884.01,2585.22 ; 4958.71,2585.22 4958.71,2353.33 4984.01,2353.33 4984.01,2585.22 ; 5058.71,2585.22 5058.71,2353.33 5084.01,2353.33 5084.01,2585.22 ; 5158.71,2585.22 5158.71,2353.33 5184.01,2353.33 5184.01,2585.22 ; 5258.71,2585.22 5258.71,2353.33 5284.01,2353.33 5284.01,2585.22 ; 3321.42,2601.36 3321.42,2699.78 5321.41,2699.78 5321.41,2601.36 3321.42,2601.36
  lines w23.62: 3808.87,4352.03 cw(c3808.97,4363.84) 3809.07,4352.03
  text "1" at 2987.5,5405.77 h31.5 r180
  text "BSEL0" at 2652.5,5374.28 h31.5
  text "RE2-MegaMod to RE:Birth REV.0.2" at 3172.5,5255.81 h98.42
  text "Designed by" at 3491.98,5165.5 h59.05 r359
  text "2023.12.4" at 5202.5,5159.1 h59.05
  text "Audio IN" at 5892.5,4991.4 h47.24
  text "FM Vol." at 5897.5,4456.4 h47.24
  text "MegaMod-DCSG" at 3788.91,4403.02 h59.05 r90
  text "YM3438/YM2612" at 5093.32,4381.42 h47.24 r2
  text "MegaMod Connector" at 3561.12,4370.02 h47.24 r90
  text "OPN2(C)+DCSG Mixer by kunoichi labs" at 4542.5,4265.5 h59.05
  text "RE:birth" at 2662.36,4253.23 h118.11 r90
  text "github.com/denjhang" at 2742.84,4228.23 h59.05 r90
  text "MegaMod-FM" at 3204.72,4159.64 h80 r86
  text "A.VCC" at 4987.5,4141.4 h47.24
  text "CLK-FM" at 2807.5,3666.4 h47.24
  text "CLK-DCSG" at 4152.5,3661.4 h47.24
  text "DCSG Vol." at 5837.5,3651.4 h47.24
  text "BSEL0" at 3252.5,3566.4 h47.24
  text "VCC" at 4672.5,3561.4 h47.24
  text "OUT" at 5917.5,3266.4 h47.24
  text "BSEL1" at 3252.5,3206.4 h47.24
  text "IN/OUT" at 5274.56,3186.49 h47.24 r5
  text "IN.L" at 5837.5,2921.4 h47.24
  text "L" at 5222.28,2844.12 h23.62 r300
  text "D1" at 3744.32,2841.43 h23.62 r90
  text "B1" at 4344.32,2841.43 h23.62 r90
  text "A1" at 4144.32,2840.38 h23.62 r90
  text "D3" at 3844.32,2836.57 h23.62 r90
  text "D5" at 3944.32,2836.57 h23.62 r90
  text "D7" at 4044.32,2836.57 h23.62 r90
  text "B3" at 4444.32,2836.57 h23.62 r90
  text "NC" at 3444.32,2836.07 h23.62 r90
  text "A3" at 4244.32,2835.53 h23.62 r90
  text "GND" at 3344.32,2825.03 h23.62 r90
  text "/CS" at 3644.23,2814.16 h23.62 r97
  text "/WR" at 3544.26,2811.26 h23.62 r96
  text "NC" at 4944.32,2789.82 h23.62 r90
  text "GND" at 4744.32,2778.78 h23.62 r90
  text "GND" at 4844.32,2778.78 h23.62 r90
  text "VCC" at 4544.32,2777.12 h23.62 r90
  text "VCC" at 4644.32,2777.12 h23.62 r90
  text "AGND" at 5044.32,2766.62 h23.62 r90
  text "AVCC" at 5144.32,2765.03 h23.62 r90
  text "R" at 5220.7,2750.03 h23.62 r270
  text "D0" at 3744.32,2740.03 h23.62 r90
  text "D2" at 3844.32,2740.03 h23.62 r90
  text "D4" at 3944.32,2740.03 h23.62 r90
  text "D6" at 4044.32,2740.03 h23.62 r90
  text "A0" at 4144.32,2740.03 h23.62 r90
  text "A2" at 4244.32,2740.03 h23.62 r90
  text "B0" at 4344.32,2740.03 h23.62 r90
  text "B2" at 4444.32,2740.03 h23.62 r90
  text "/IC" at 3544.14,2728.68 h23.62 r100
  text "CLK" at 3344.32,2725.03 h23.62 r90
  text "/RD" at 3644.21,2721.27 h23.62 r98
  text "/IRQ" at 3444.29,2715.85 h23.62 r94
  text "IN.R" at 5832.5,2591.4 h47.24

## Text inside footprints (layer, text, board x,y; h text height)
RV1: Top Overlay "RK097" at 6148.4,4705.02 h20 r90
RV2: Top Overlay "RK097" at 6153.4,3915.03 h20 r90